# EAGLE board rapidshark-battery-conn-mk-1.0 (EAGLE 6.5.0)
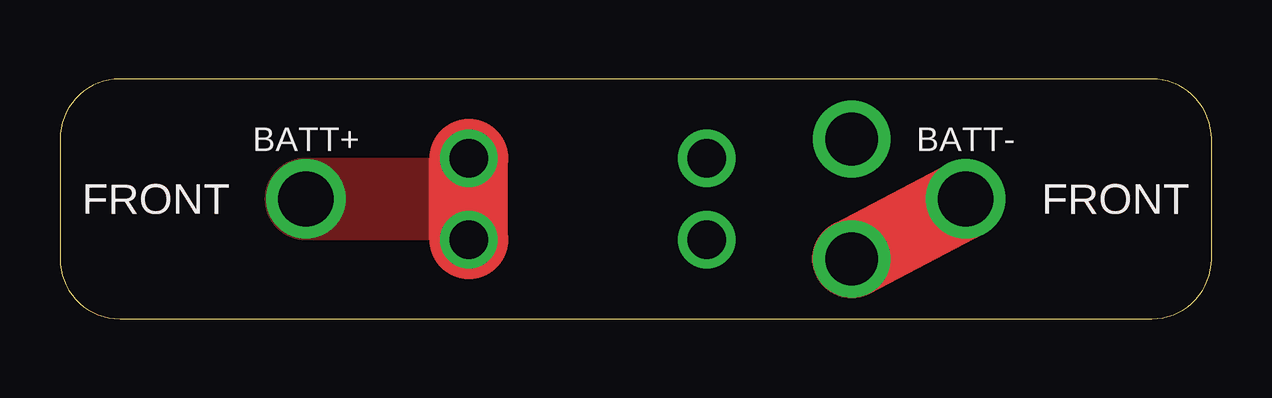
[diagram p0: board, top side]
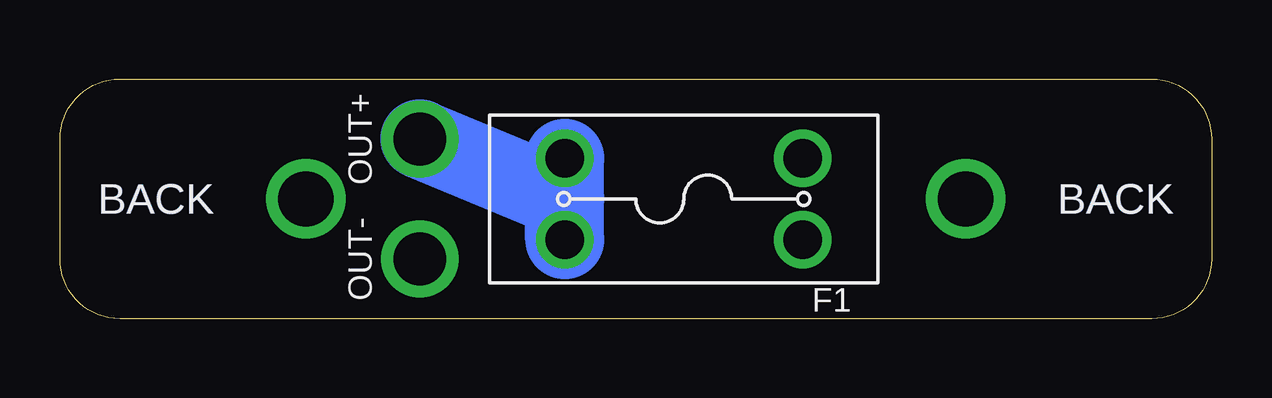
[diagram p1: board, bottom side, seen from below]

Size 48 x 10 mm. Coordinates in mm from the lower left corner, seen from the top.
Outline: 0,7.5 0,2.5 arc90 2.5,0 45.5,0 arc90 48,2.5 48,7.5 arc90 45.5,10 2.5,10 arc90 0,7.5
Copper layers (1*16): Top 0.0356mm / dielectric 1.5011mm / Bottom 0.0356mm
Design rules "LaenPCBOrder_2": minimum track width 6mil, minimum drill 13mil, track to track 6mil, track to pad 6mil, pad to pad 6mil, via to via 6mil, smd to smd 6mil, copper to edge 15mil, drill to drill 6mil, minimum pad ring 7mil, minimum via ring 7mil, stop-mask expansion 3mil, vias tented up to drill 20mil, thermal gap 10mil

## Footprints (pad centres in the part's own frame; a part is rotated, then mirrored left to right if it is on the bottom)
1X01-2.3MM = drill 2.3 pad 3.3: 1 0,0
KEYSTONE-MINI-AUTO-FUSE-HOLDER = drill 1.6: P1@1 -4.96,1.7; P1@2 -4.96,-1.7; P2@1 4.96,1.7; P2@2 4.96,-1.7
1X01-12AWG = drill 2.2 pad 3.2: 1 0,0

## Placement (x,y rotation side)
BATT+  M01PTH-2.3MM  [1X01-2.3MM]  10.25,5 0 top
BATT-  M01PTH-2.3MM  [1X01-2.3MM]  37.75,5 0 top
F1  15A  [KEYSTONE-MINI-AUTO-FUSE-HOLDER]  22,5 180 bottom
FRAME1  FRAME-LETTERNO_PACKAGE  [DUMMY]  0,0 0 top
OUT+  M0112AWG  [1X01-12AWG]  33,7.5 90 bottom
OUT-  M0112AWG  [1X01-12AWG]  33,2.5 90 bottom

## Library data of the parts
BATT+ BATT- F1 OUT+ OUT- = A_butts
FRAME1 = A_butts; DESIGNER: Nobody; VERSION: v01

## Nets
BATT+: BATT+.1 F1.P1@1 F1.P1@2
BATT-: BATT-.1 OUT-.1
OUT+: F1.P2@1 F1.P2@2 OUT+.1

## Tracks (layer width: path | path; a pad name or v marks a point on that pad's centre or on a via)
BATT+
  Top 3.3: F1.P1@1 F1.P1@2
  pour Top (no thermals): 18.1,6.65 18.1,3.35 10.25,3.35 arc-180 10.25,6.65
BATT-
  Top 3.3: BATT-.1 OUT-.1
OUT+
  Bottom 3.3: F1.P2@1 26.96,5 | 26.96,5 F1.P2@2 | OUT+.1 26.96,5

## Text on the board
Top: FRONT | FRONT
Bottom: BACK | BACK
tPlace: FRONT | FRONT
bPlace: BACK | BACK
Document: Top faces front of gun